# EAGLE board CT_schematic (EAGLE 7.6.0)

Size 100 x 80 mm. Coordinates in mm from the lower left corner, seen from the top.
Outline: 0,0 100,0 100,80 0,80 0,0
Copper layers (1*16): Top 0.035mm / dielectric 1.5mm / Bottom 0.035mm
Design rules "default": minimum track width 10mil, minimum drill 24mil, track to track 8mil, track to pad 8mil, pad to pad 8mil, via to via 8mil, smd to smd 8mil, copper to edge 40mil, drill to drill 8mil, minimum pad ring 10mil, minimum via ring 8mil, stop-mask expansion 4mil, vias tented up to drill 0mil, thermal gap 10mil

## Footprints (pad centres in the part's own frame; a part is rotated, then mirrored left to right if it is on the bottom)
C0603 = smd 0.8 x 0.8: 1 -0.762,0; 2 0.762,0
C0402 = smd 0.5 x 0.5: 1 -0.508,0; 2 0.508,0
C0805 = smd 1.2 x 1.3: 1 -1.016,0; 2 1.016,0
C1210 = smd 1.2 x 2.5: 1 -1.524,0; 2 1.524,0
C1206 = smd 1.3 x 1.6: 1 -1.524,0; 2 1.524,0
L0603 = smd 0.8 x 0.8: 1 -0.762,0; 2 0.762,0
DR1040 = smd 1.6 x 3.2: 1 -4.458,0; 2 4.458,0
L1210 = smd 1.2 x 2.5: 1 -1.524,0; 2 1.524,0
R0603 = smd 0.8 x 0.8: 1 -0.762,0; 2 0.762,0
LQFP64 = smd 0.3 x 1.2: 1 -3.75,-5.75; 2 -3.25,-5.75; 3 -2.75,-5.75; 4 -2.25,-5.75; 5 -1.75,-5.75; 6 -1.25,-5.75; 7 -0.75,-5.75; 8 -0.25,-5.75; 9 0.25,-5.75; 10 0.75,-5.75; 11 1.25,-5.75; 12 1.75,-5.75; 13 2.25,-5.75; 14 2.75,-5.75; 15 3.25,-5.75; 16 3.75,-5.75; 33 3.75,5.75; 34 3.25,5.75; 35 2.75,5.75; 36 2.25,5.75; 37 1.75,5.75; 38 1.25,5.75; 39 0.75,5.75; 40 0.25,5.75; 41 -0.25,5.75; 42 -0.75,5.75; 43 -1.25,5.75; 44 -1.75,5.75; 45 -2.25,5.75; 46 -2.75,5.75; 47 -3.25,5.75; 48 -3.75,5.75 | smd 1.2 x 0.3: 17 5.75,-3.75; 18 5.75,-3.25; 19 5.75,-2.75; 20 5.75,-2.25; 21 5.75,-1.75; 22 5.75,-1.25; 23 5.75,-0.75; 24 5.75,-0.25; 25 5.75,0.25; 26 5.75,0.75; 27 5.75,1.25; 28 5.75,1.75; 29 5.75,2.25; 30 5.75,2.75; 31 5.75,3.25; 32 5.75,3.75; 49 -5.75,3.75; 50 -5.75,3.25; 51 -5.75,2.75; 52 -5.75,2.25; 53 -5.75,1.75; 54 -5.75,1.25; 55 -5.75,0.75; 56 -5.75,0.25; 57 -5.75,-0.25; 58 -5.75,-0.75; 59 -5.75,-1.25; 60 -5.75,-1.75; 61 -5.75,-2.25; 62 -5.75,-2.75; 63 -5.75,-3.25; 64 -5.75,-3.75
TDFN-8/6MM = smd 0.3 x 0.75: 1 0,0; 2 0.5,0; 3 1,0; 4 1.5,0; 5 1.5,3; 6 1,3; 7 0.5,3; 8 0,3
SOIC-8 = smd 1.6 x 0.6: 1 -2.7,1.905 | smd 1.55 x 0.6: 2 -2.7,0.635; 3 -2.7,-0.635; 4 -2.7,-1.905; 5 2.7,-1.905; 6 2.7,-0.635; 7 2.7,0.635; 8 2.7,1.905
182-009-MALE = drill 1.194 pad 1.524 octagon: 1 -5.537,10.923; 2 -2.769,10.923; 3 0,10.923; 4 2.769,10.923; 5 5.537,10.923; 6 -4.153,8.08; 7 -1.384,8.08; 8 1.384,8.08; 9 4.153,8.08 | hole 3.048: -12.446,9.501; 12.446,9.501
FCI_10118193-0001LF = smd 0.4 x 1.35: 1 -1.3,2.675; 2 -0.65,2.675; 3 0,2.675; 4 0.65,2.675; 5 1.3,2.675 | smd 1.6 x 1.4: 6 -3.2,2.45; 7 3.2,2.45 | smd 1.9 x 1.9: 8 -1.2,0; 9 1.2,0 | hole 0.5: -3.3,0; 3.3,0
SOT143B = smd 1 x 0.7: 1 -0.75,-1 | smd 0.6 x 0.7: 2 0.95,-1; 3 0.95,1; 4 -0.95,1
ABS07-32.768KHZ-7-T = smd 1.1 x 2.4: 1 -2.5,0; 2 0,0
ABLS-25.000MHZ-B2F-T = smd 5.6 x 2.8: 1 -3.81,0; 2 5.69,0
TSOT-23-5 = smd 1.3 x 0.62: 1 -1.31,0.95; 2 -1.31,0; 3 -1.31,-0.95; 4 1.31,-0.95; 5 1.31,0.95
DFN-8_DDB = smd 0.805 x 0.3: 1 -0.952,0.75; 2 -0.952,0.25; 3 -0.952,-0.25; 4 -0.952,-0.75; 5 0.952,-0.75; 6 0.952,-0.25; 7 0.952,0.25; 8 0.952,0.75 | smd 0.61 x 2.2: 9 0,0
DFN8_2X3MC = smd 0.813 x 0.305: 1 -1.398,0.75; 2 -1.398,0.25; 3 -1.398,-0.25; 4 -1.398,-0.75; 5 1.398,-0.75; 6 1.398,-0.25; 7 1.398,0.25; 8 1.398,0.75 | smd 1.753 x 1.549: 9 0,0
JST-2-SMD = smd 1 x 4.6: 1 -1,-3.7; 2 1,-3.7 | smd 1.6 x 3.4: NC1 -3.4,1.5; NC2 3.4,1.5
SON-6 = smd 0.55 x 0.3: 1 -0.355,0.5 | smd 0.52 x 0.3: 2 -0.37,0; 3 -0.37,-0.5; 4 0.37,-0.5; 5 0.37,0; 6 0.37,0.5
SW_4-1437565-2 = smd 1.4 x 2.1: 1 -2.23,4.55; 2 -2.23,-4.55; 3 2.23,4.55; 4 2.23,-4.55
LGM67K-G1J2-24-Z = smd 0.8 x 1.4: A -2,0; C 0,0
NC7SZ125M5X = smd 1.3 x 0.7: 1 -1.3,0.95; 2 -1.3,0; 3 -1.3,-0.95; 4 1.3,-0.95; 5 1.3,0.95

## Placement (x,y rotation side)
C1  1e-06  [C0603]  -45.72,60.96 0 top  (outside the outline)
C2  1e-07  [C0603]  -49.53,60.96 0 top  (outside the outline)
C3  1e-07  [C0603]  -53.34,60.96 0 top  (outside the outline)
C4  1e-07  [C0603]  -57.15,60.96 0 top  (outside the outline)
C5  1e-07  [C0603]  -60.96,60.96 0 top  (outside the outline)
C6  4.7e-06  [C0603]  -34.29,60.96 0 top  (outside the outline)
C7  1e-07  [C0603]  -64.77,60.96 0 top  (outside the outline)
C8  1e-08  [C0603]  -68.58,60.96 0 top  (outside the outline)
C9  1e-06  [C0603]  -72.39,60.96 0 top  (outside the outline)
C10  1e-11  [C0402]  -57.15,66.04 0 top  (outside the outline)
C11  1e-11  [C0402]  -60.96,66.04 0 top  (outside the outline)
C12  1e-11  [C0402]  -64.77,66.04 0 top  (outside the outline)
C13  1e-11  [C0402]  -68.58,66.04 0 top  (outside the outline)
C14  1e-08  [C0402]  -72.39,66.04 0 top  (outside the outline)
C15  1e-08  [C0402]  -15.24,71.12 0 top  (outside the outline)
C16  1e-06  [C0603]  -15.24,66.04 0 top  (outside the outline)
C17  1e-06  [C0603]  -19.05,66.04 0 top  (outside the outline)
C18  1e-05  [C0805]  -21.59,54.61 0 top  (outside the outline)
C19  1e-05  [C0805]  -26.67,54.61 0 top  (outside the outline)
C20  1e-05  [C1210]  -48.26,46.99 0 top  (outside the outline)
C21  2.2e-06  [C0603]  -38.1,60.96 0 top  (outside the outline)
C22  2.2e-07  [C0603]  -41.91,60.96 0 top  (outside the outline)
C23  1e-07  [C0402]  -19.05,71.12 0 top  (outside the outline)
C24  1e-05  [C1206]  -60.96,46.99 0 top  (outside the outline)
C25  1e-05  [C1206]  -67.31,46.99 0 top  (outside the outline)
C26  1e-08  [C0402]  -22.86,71.12 0 top  (outside the outline)
F1  240.0  [L0603]  -22.86,66.04 0 top  (outside the outline)
I1  5.2e-06  [DR1040]  -38.1,27.94 0 top  (outside the outline)
I2  1e-05  [L1210]  -54.61,46.99 0 top  (outside the outline)
R2  1000.0  [R0603]  -26.67,66.04 0 top  (outside the outline)
R4  4700.0  [R0603]  -30.48,66.04 0 top  (outside the outline)
R5  2200.0  [R0603]  -34.29,66.04 0 top  (outside the outline)
R6  2200.0  [R0603]  -38.1,66.04 0 top  (outside the outline)
R7  2200.0  [R0603]  -41.91,66.04 0 top  (outside the outline)
R8  2200.0  [R0603]  -45.72,66.04 0 top  (outside the outline)
R9  10000.0  [R0603]  -72.39,54.61 0 top  (outside the outline)
R10  120.0  [R0603]  -49.53,66.04 0 top  (outside the outline)
R11  309473.68421053  [R0603]  -41.91,54.61 0 top  (outside the outline)
R12  1000000.0  [R0603]  -46.99,54.61 0 top  (outside the outline)
R13  100000.0  [R0603]  -52.07,54.61 0 top  (outside the outline)
R14  560000.0  [R0603]  -57.15,54.61 0 top  (outside the outline)
R15  10000.0  [R0603]  -15.24,60.96 0 top  (outside the outline)
R16  10000.0  [R0603]  -20.32,60.96 0 top  (outside the outline)
R17  18000.0  [R0603]  -25.4,60.96 0 top  (outside the outline)
R18  470000.0  [R0603]  -62.23,54.61 0 top  (outside the outline)
R19  120000.0  [R0603]  -67.31,54.61 0 top  (outside the outline)
R20  2000.0  [R0603]  -53.34,66.04 0 top  (outside the outline)
R21  10000.0  [R0603]  -30.48,60.96 0 top  (outside the outline)
U1  stm32f103r8t7  [LQFP64]  -62.23,7.62 0 top  (outside the outline)
U2  24AA00T-I/MNY  [TDFN-8/6MM]  -69.85,26.67 0 top  (outside the outline)
U3  24AA02T-I/MNY  [TDFN-8/6MM]  -24.13,38.1 0 top  (outside the outline)
U4  MCP2562-E/SN  [SOIC-8]  -36.83,39.37 0 top  (outside the outline)
U5  182-009-113R531  [182-009-MALE]  -36.83,6.35 0 top  (outside the outline)
U6  10118193-0001LF  [FCI_10118193-0001LF]  -46.99,38.1 0 top  (outside the outline)
U7  prtr5v0u2ax  [SOT143B]  -41.91,71.12 0 top  (outside the outline)
U8  ABS07-32.768KHZ-7-T  [ABS07-32.768KHZ-7-T]  -27.94,48.26 0 top  (outside the outline)
U9  ABLS-25.000MHZ-B2F-T  [ABLS-25.000MHZ-B2F-T]  -66.04,38.1 0 top  (outside the outline)
U10  ltc3406es5  [TSOT-23-5]  -31.75,53.34 0 top  (outside the outline)
U11  LT3494AEDDB#TRMPBF  [DFN-8_DDB]  -26.67,71.12 0 top  (outside the outline)
U12  MCP73831T-2ACI/MC  [DFN8_2X3MC]  -52.07,69.85 0 top  (outside the outline)
U13  S2B-PH-SM4-TB(LF)(SN)  [JST-2-SMD]  -53.34,29.21 0 top  (outside the outline)
U14  TPS3895ADRYR  [SON-6]  -45.72,69.85 0 top  (outside the outline)
U15  4-1437565-2  [SW_4-1437565-2]  -27.94,27.94 0 top  (outside the outline)
U16  Q65110A2395  [LGM67K-G1J2-24-Z]  -36.83,46.99 0 top  (outside the outline)
U17  nc7sz125m5x  [NC7SZ125M5X]  -15.24,54.61 0 top  (outside the outline)

## Library data of the parts
C1-C26 F1 I1 I2 R2 R4-R21 U1-U17 = circuit_tree

## Nets
CLK_CRYSTAL_U1_3: C10.1 U1.3 U8.1
CLK_CRYSTAL_U1_4: C11.1 U1.4 U8.2
CLK_CRYSTAL_U1_5: C12.1 U1.5 U9.1
CLK_CRYSTAL_U1_6: C13.1 U1.6 U9.2
GND: C1.2 C2.2 C3.2 C4.2 C5.2 C6.2 C7.2 C8.2 C9.2 C10.2 C11.2 C12.2 C13.2 C14.2 C15.2 C16.2 C17.2 C18.2 C19.1 C19.2 C20.2 C21.2 C22.2 C23.2 C24.2 C25.2 C26.2 R2.2 R9.2 R11.2 R17.2 R19.2 R20.2 U1.12 U1.18 U1.31 U1.47 U1.63 U2.4 U3.4 U3.7 U4.2 U4.8 U5.5 U6.5 U6.6 U6.7 U6.8 U6.9 U7.1 U10.2 U11.2 U11.9 U12.6 U12.9 U13.2 U14.2 U16.C U17.1 U17.3
INPUT_USBPOWER_5V: C24.1 R21.2 U6.1 U7.4 U12.1 U12.2
NET_U1_7: R4.1 U1.7 U17.4
NET_U1_13: C8.1 C9.1 F1.1 U1.13
NET_U1_29: R7.1 U1.29 U2.6
NET_U1_30: R8.1 U1.30 U2.5
NET_U1_56: U16.A
NET_U1_57: U15.3 U15.4
NET_U1_58: R5.1 U1.58 U3.6
NET_U1_59: R6.1 U1.59 U3.5
NET_U1_60: R9.1 U1.60
NET_U4_6: R10.2 U4.6
NET_U5_2: R10.2 U4.6 U5.2
NET_U5_3: R10.1 U4.7 U5.3
NET_U10_1: U10.1
NET_U10_3: I1.1 U10.3
NET_U10_5: R11.1 R12.1 U10.5
NET_U10_ATNET_3: I1.2 R12.2
NET_U11_1: I2.1 U11.1
NET_U11_5: R13.1 U11.5
NET_U11_6: R14.1 U11.6
NET_U11_8: C22.1 U11.8
NET_U12_5: R21.1 U12.5
NET_U12_8: R20.1 U12.8
NET_U14_1: R16.1 R17.1 U14.1
NET_U14_3: R18.2 R19.1 U14.3
NET_U14_4: R15.1 U14.4 U17.2
NET_U15_1: R2.1 U15.1 U15.2
PROC_CAN_RX: U1.61 U4.4
PROC_CAN_TX: U1.62 U4.1
PROC_USB_DM: U1.44 U6.2 U7.3
PROC_USB_DP: U1.45 U6.3 U7.2
VCC_S1_3V7: C18.1 C20.1 C25.1 I2.2 R13.2 U10.4 U11.3 U11.4 U12.3 U12.4 U13.1
VCC_TIER1_2V5: C1.1 C2.1 C3.1 C4.1 C5.1 C6.1 C7.1 C14.1 C15.1 C17.1 C19.2 C23.1 C26.1 F1.2 I1.2 R4.2 R5.2 R6.2 R7.2 R8.2 R12.2 R15.2 R16.2 R18.1 U1.1 U1.19 U1.32 U1.48 U1.64 U2.8 U3.8 U4.5 U14.6 U17.5
VCC_TIER1_5V0: C16.1 C21.1 R14.2 U4.3 U11.7

## Tracks (layer width: path | path; a pad name or v marks a point on that pad's centre or on a via)
CLK_CRYSTAL_U1_3  (2 unrouted)
CLK_CRYSTAL_U1_4  (2 unrouted)
CLK_CRYSTAL_U1_5  (2 unrouted)
CLK_CRYSTAL_U1_6  (2 unrouted)
GND  (59 unrouted)
INPUT_USBPOWER_5V  (5 unrouted)
NET_U1_7  (2 unrouted)
NET_U1_13  (3 unrouted)
NET_U1_29  (2 unrouted)
NET_U1_30  (2 unrouted)
NET_U1_57  (1 unrouted)
NET_U1_58  (2 unrouted)
NET_U1_59  (2 unrouted)
NET_U1_60  (1 unrouted)
NET_U4_6  (1 unrouted)
NET_U5_2  (2 unrouted)
NET_U5_3  (2 unrouted)
NET_U10_3  (1 unrouted)
NET_U10_5  (2 unrouted)
NET_U10_ATNET_3  (1 unrouted)
NET_U11_1  (1 unrouted)
NET_U11_5  (1 unrouted)
NET_U11_6  (1 unrouted)
NET_U11_8  (1 unrouted)
NET_U12_5  (1 unrouted)
NET_U12_8  (1 unrouted)
NET_U14_1  (2 unrouted)
NET_U14_3  (2 unrouted)
NET_U14_4  (2 unrouted)
NET_U15_1  (2 unrouted)
PROC_CAN_RX  (1 unrouted)
PROC_CAN_TX  (1 unrouted)
PROC_USB_DM  (2 unrouted)
PROC_USB_DP  (2 unrouted)
VCC_S1_3V7  (10 unrouted)
VCC_TIER1_2V5  (33 unrouted)
VCC_TIER1_5V0  (4 unrouted)